# Altium PCB Neural_Interface.PcbDoc
Units mil, origin at the board's own origin, x right, y up, seen from the top; angles counter-clockwise.
Board outline 950 x 670 mil, 4 copper layers (Top Copper Layer, Internal Copper Layer 1, Internal Copper Layer 2, Bottom Copper Layer), stack 62.205 mil thick; 14 components, 31 nets, 97 pads, 11 vias.
Unrouted connection lines stored in the file: 2.
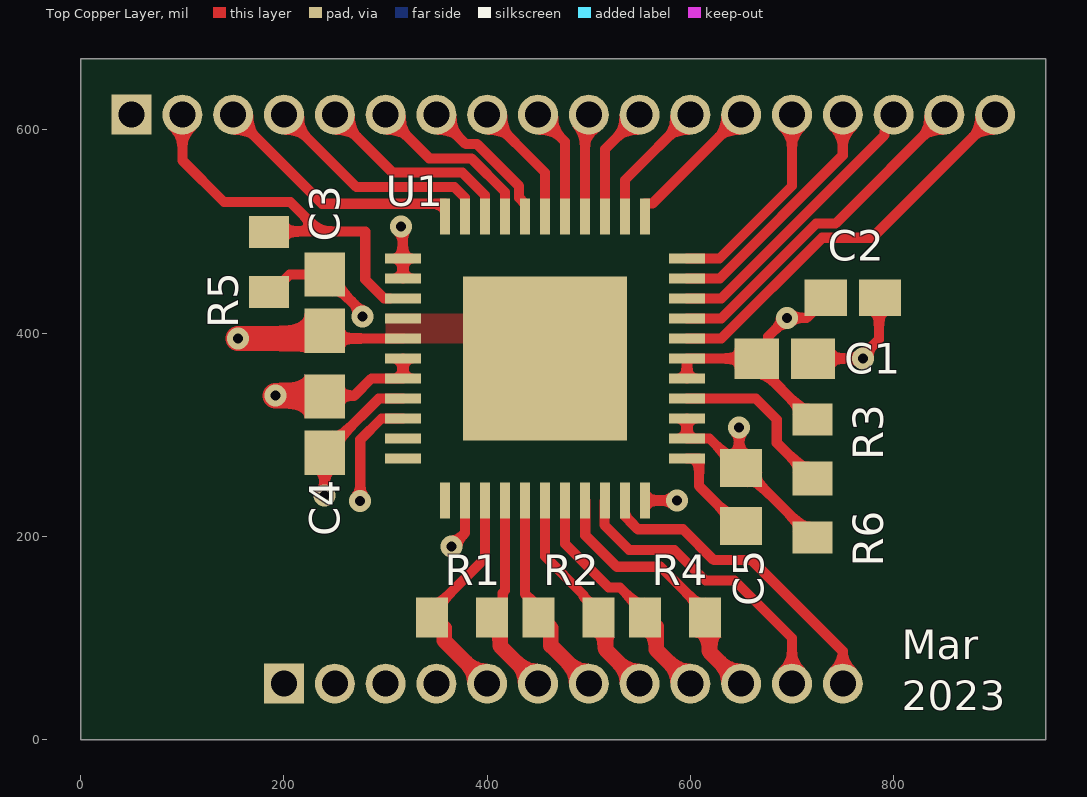
[diagram p0: Top Copper Layer view]
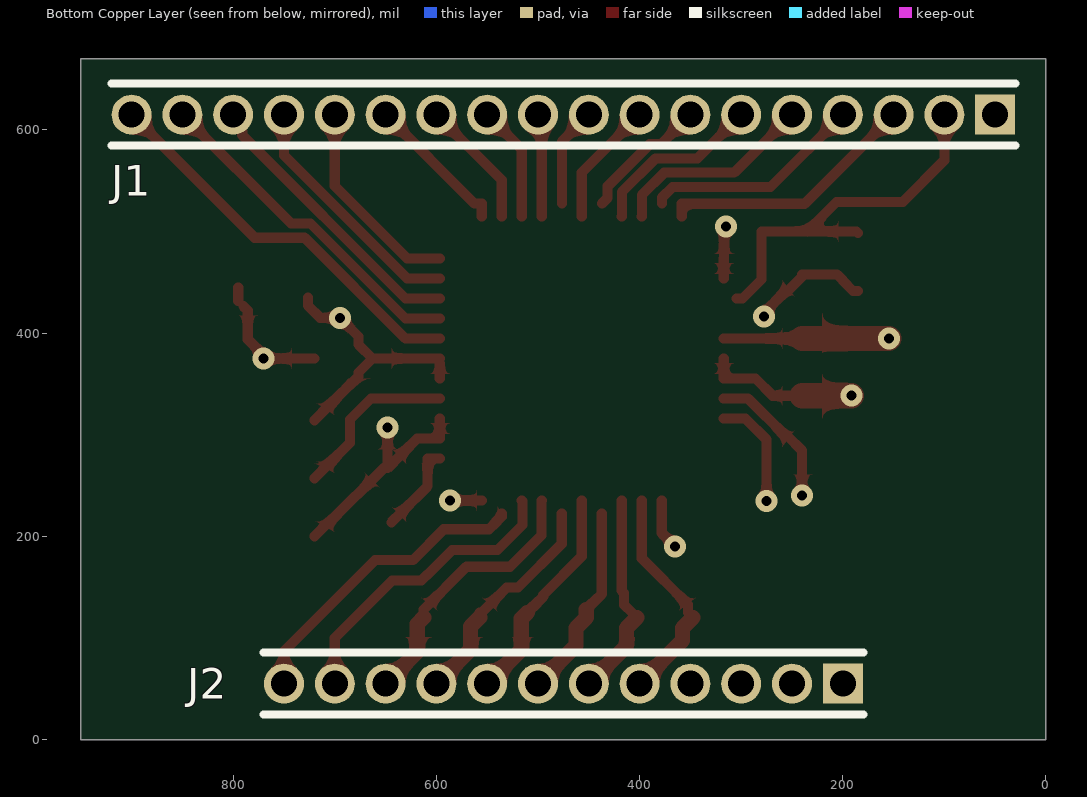
[diagram p1: Bottom Copper Layer view, seen from below]
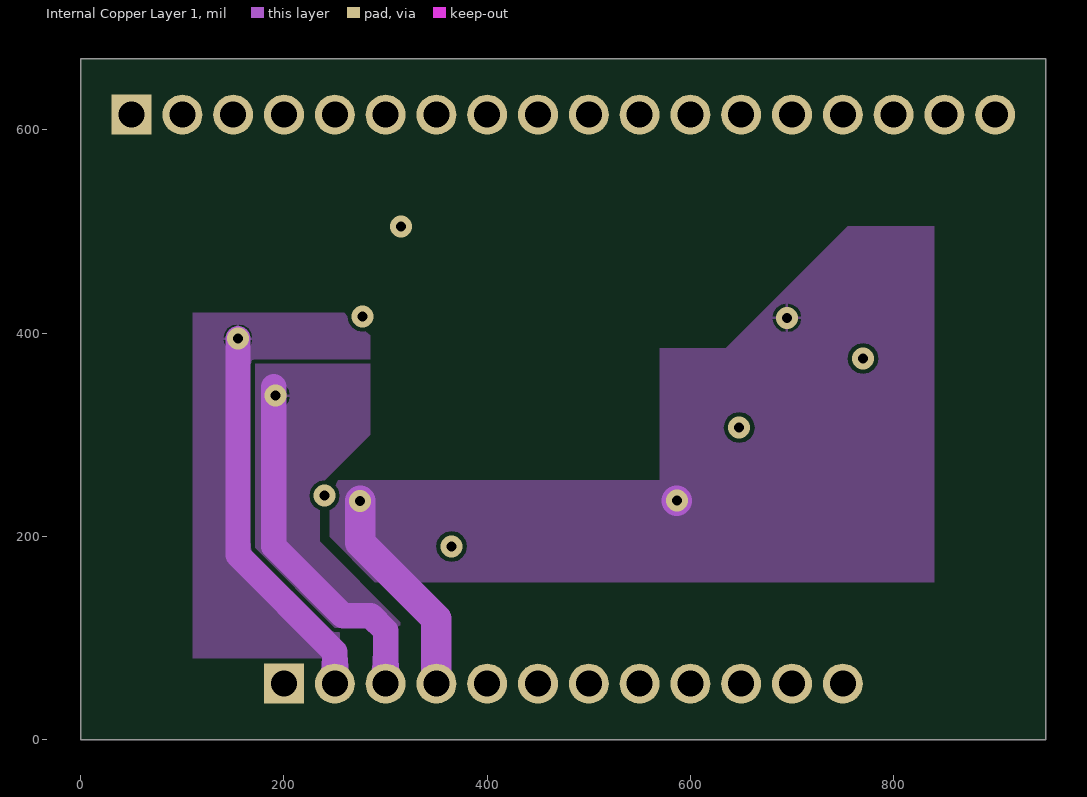
[diagram p2: Internal Copper Layer 1]
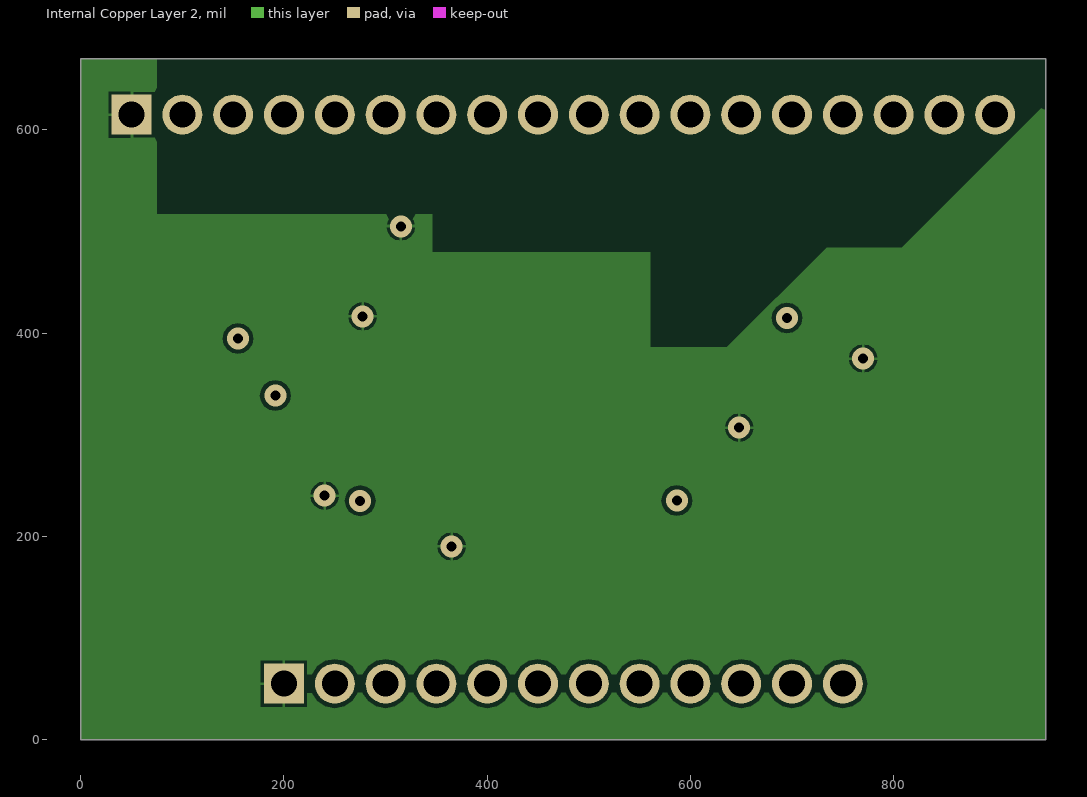
[diagram p3: Internal Copper Layer 2]
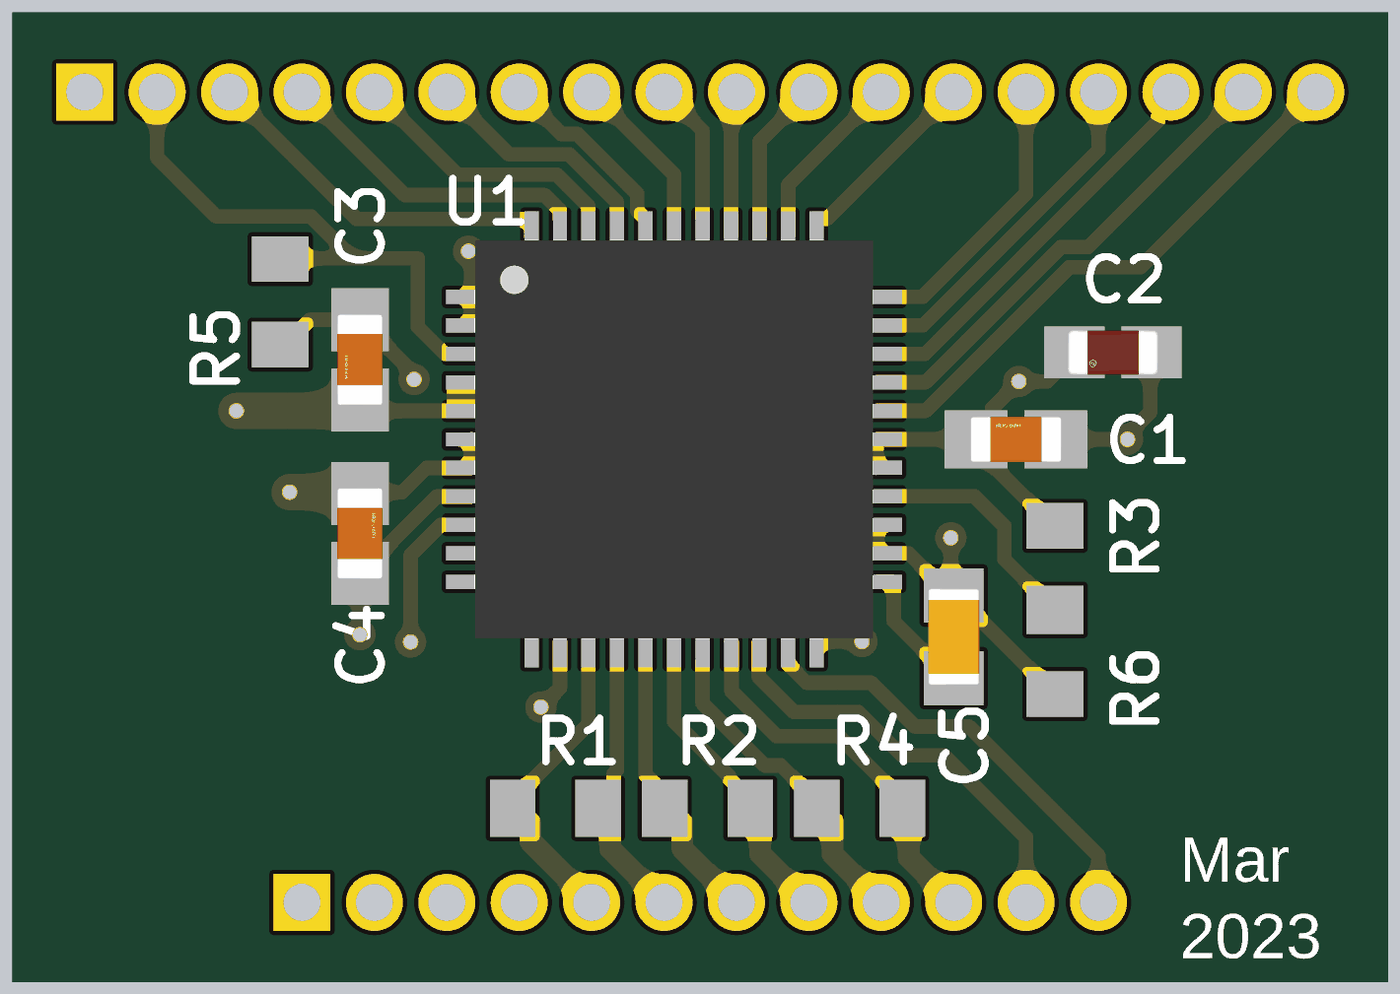
[diagram p4: 3D render of the assembled board from above, using the file's embedded part models]

## Layer stack, top to bottom
Top Solder: solder mask 0.3937, Solder Resist, Dk 3.5
Top Copper Layer: signal copper 1.378
Dielectric 1: prepreg 8.6614, FR-4, Dk 4.2
Internal Copper Layer 1: signal copper 1.378
Dielectric 2: core 39.3701, FR-4, Dk 4.2
Internal Copper Layer 2: signal copper 1.378
Dielectric 3: prepreg 8.6614, FR-4, Dk 4.2
Bottom Copper Layer: signal copper 1.378
Bottom Solder: solder mask 0.3937, Solder Resist, Dk 3.5

## Board outline
0,0 950,0 950,670 0,670

## Design rules (kind name [scope] priority, off if disabled: settings)
BoardOutlineClearance [All] p1: gap=0 ignorepadtopadclearanceinfootprint=FALSE
Clearance [All] p1: gap=4 ignorepadtopadclearanceinfootprint=FALSE
ComponentClearance [All] p1: gap=3.94 collisioncheckmode=3 verticalgap=3.94 showdistances=FALSE
DiffPairsRouting [All] p1: maxlimit=10 minlimit=10 mostfreqgap=10 toplayer_minwidth=15 toplayer_maxwidth=15 toplayer_prefwidth=15 midlayer1_minwidth=15 midlayer1_maxwidth=15 midlayer1_prefwidth=15 midlayer2_minwidth=15 midlayer2_maxwidth=15 midlayer2_prefwidth=15 bottomlayer_minwidth=15 bottomlayer_maxwidth=15 bottomlayer_prefwidth=15 maxuncoupledlength=500
HoleSize [All] p1: absolutevalues=TRUE maxlimit=100 minlimit=3.94 maxpercent=80.000 minpercent=20.000
HoleToHoleClearance [All] p1: gap=10.83 allowstackedmicrovias=TRUE
MinimumAnnularRing [All] p1: minimumring=3.94
MinimumSolderMaskSliver [All] p1: minsoldermaskwidth=2.95
PlaneClearance [All] p1: clearance=2.95
PlaneConnect [All] p1: planeconnectstyle=Relief reliefexpansion=5.91 reliefentries=4 reliefconductorwidth=2.95 reliefairgap=2.95
PolygonConnect [All] p1: connectstyle=Relief reliefconductorwidth=2.95 reliefentries=4 polygonreliefangle="90 Angle" airgapwidth=2.95
RoutingVias [All] p1: holewidth=9.84 width=23.62 viastyle="Through Hole" minholewidth=3.94 minwidth=7.87 maxholewidth=28 maxwidth=50
SilkToSilkClearance [All] p1: silktosilkclearance=5.91
SilkToSolderMaskClearance [IsPad] p1: minsilkscreentomaskgap=5.91 clearancetoexposedcopper=TRUE
SolderMaskExpansion [All] p1: expansion=2.95 istentingtop=FALSE
Width [All] p1: maxlimit=1968.5 minlimit=2.95 preferedwidth=5.91
21 further rules are at their usual default settings.

## Classes and differential pairs
net class ELEC[0..15]: ELEC0 ELEC1 ELEC2 ELEC3 ELEC4 ELEC5 ELEC6 ELEC7 ELEC8 ELEC9 ELEC10 ELEC11 ELEC12 ELEC13 ELEC14 ELEC15
component class U_Intan_RHS2116: C1 C2 C3 C4 C5 U1
component class Neural_Interface: J1 J2 R1 R2 R3 R4 R5 R6
differential pair SCLK1h: +SCLK1h_P -SCLK1h_N
differential pair nCS1h: +nCS1h_P -nCS1h_N
differential pair MOSI1h: +MOSI1h_P -MOSI1h_N
differential pair MISO1h: +MISO1h_P -MISO1h_N

## Components (designator, comment, footprint, x,y, rotation, side; value= is the part's Value field where it differs from the comment)
C1 "UMJ107BB7104KAHT" FP-0603-L_1_6_0_2-W_0_8_0-IPC_B 693,375 r180 top
C2 "LMK107BJ106MALTD" FP-LMK107BJ106MALTD-IPC_B 760,435 r180 top
C3 "UMJ107BB7104KAHT" FP-0603-L_1_6_0_2-W_0_8_0-IPC_B 240,430 r270 top
C4 "UMJ107BB7104KAHT" FP-0603-L_1_6_0_2-W_0_8_0-IPC_B 240,310 r90 top
C5 "GRM188R71H103KA01D" CAPC1608X90X35ML10T15 650,238.54 r270 top
J1 "KH-1.27PH180-1X18P-L7.2" KH-1.27PH180-1X18P-L7.2 475,615 r270 bottom locked
J2 "KH-1.27PH180-1X12P-L7.2" KH-1.27PH180-1X12P-L7.2 475,55 r270 bottom locked
R1 "RC0603FR-07100RL" RESC1608X55X25ML10T15 375,120 r0 top
R2 "RC0603FR-07100RL" RESC1608X55X25ML10T15 585,120 r0 top
R3 "RC0603JR-070RL" RESC1608X55X25ML10T15 720,285.67 r90 top
R4 "RC0603FR-07100RL" RESC1608X55X25ML10T15 480,120 r0 top
R5 "RC0603JR-070RL" RESC1608X55X25ML10T15 185,470 r90 top
R6 "RC0603JR-070RL" RESC1608X55X25ML10T15 720,228.54 r90 top
U1 "Intan Technologies RHS2116 chip" QFN44_7_X_7 456.89,375 r0 top

## Footprints (in the part's own frame and the unit in brackets; to place one, negate y for a bottom-side part, rotate by r counter-clockwise, add the part's x,y. Pads: shape width x height; smd on the part's side, far side on the other; paste and mask are expansions set on the pad)
CAPC1608X90X35ML10T15 [mm] "Chip Capacitor, 2-Leads, Body 1.7x0.9mm, IPC Low Density"
  rect 0.95x1.05 smd: 1(-0.725,0) 2(0.725,0)
  body extent -0.85,-0.45 0.85,0.45, height 0.9
FP-0603-L_1_6_0_2-W_0_8_0-IPC_B [mil]
  rect 43.61x39.85 smd paste+0 mask+0: 1(-27.65,0) 2(27.65,0)
  body extent -59,-30 59,30, height 10
FP-LMK107BJ106MALTD-IPC_B [mil]
  rect 41.64x35.91 smd paste+0 mask+0: 1(-26.66,0) 2(26.66,0)
  body extent -57,-28 57,28, height 10
KH-1.27PH180-1X12P-L7.2 [mm]
  rect 1x1 hole 0.65: 1(0,6.985)
  round 1 hole 0.65: 2(0,5.715) 3(0,4.445) 4(0,3.175) 5(0,1.905) 6(0,0.635) 7(0,-0.635) 8(0,-1.905) 9(0,-3.175) 10(0,-4.445) 11(0,-5.715) 12(0,-6.985)
  silkscreen extent -0.77,-7.5 0.77,7.5
KH-1.27PH180-1X18P-L7.2 [mm]
  rect 1x1 hole 0.65: 1(0,10.795)
  round 1 hole 0.65: 2(0,9.525) 3(0,8.255) 4(0,6.985) 5(0,5.715) 6(0,4.445) 7(0,3.175) 8(0,1.905) 9(0,0.635) 10(0,-0.635) 11(0,-1.905) 12(0,-3.175) 13(0,-4.445) 14(0,-5.715) 15(0,-6.985) 16(0,-8.255) 17(0,-9.525) 18(0,-10.795)
  silkscreen extent -0.77,-11.3 0.77,11.3
QFN44_7_X_7 [mm]
  rect 0.9x0.25 smd: 1(-3.55,2.5) 2(-3.55,2) 3(-3.55,1.5) 4(-3.55,1) 5(-3.55,0.5) 6(-3.55,0) 7(-3.55,-0.5) 8(-3.55,-1) 9(-3.55,-1.5) 10(-3.55,-2) 11(-3.55,-2.5) 23(3.55,-2.5) 24(3.55,-2) 25(3.55,-1.5) 26(3.55,-1) 27(3.55,-0.5) 28(3.55,0) 29(3.55,0.5) 30(3.55,1) 31(3.55,1.5) 32(3.55,2) 33(3.55,2.5)
  rect 0.25x0.9 smd: 12(-2.5,-3.55) 13(-2,-3.55) 14(-1.5,-3.55) 15(-1,-3.55) 16(-0.5,-3.55) 17(0,-3.55) 18(0.5,-3.55) 19(1,-3.55) 20(1.5,-3.55) 21(2,-3.55) 22(2.5,-3.55) 34(2.5,3.55) 35(2,3.55) 36(1.5,3.55) 37(1,3.55) 38(0.5,3.55) 39(0,3.55) 40(-0.5,3.55) 41(-1,3.55) 42(-1.5,3.55) 43(-2,3.55) 44(-2.5,3.55)
  rect 4.1x4.1 smd: CENTER(0,0)
  body extent -3.5,-3.5 3.5,3.5, height 0.77
RESC1608X55X25ML10T15 [mm] "Chip Resistor, 2-Leads, Body 1.60x0.80mm, IPC Low Density"
  rect 0.8x1 smd: 1(-0.75,0) 2(0.75,0)
  body extent -0.85,-0.45 0.85,0.45, height 0.55

## Part data
C1 C3 C4: library part CMP-14477-005276-2, "Multilayer Ceramic Capacitor 0.1uF 50V X7R 10% SMD 0603 T/R", Capacitance=100nF, Case Code (Imperial)=0603, Case Code (Metric)=1608, Max Operating Temperature=125°C, Min Operating Temperature=-55°C, Ratings=AEC-Q200, Tolerance=10%, Voltage Rating=50V, Case/Package=0603, Features="Soft Termination", Length=0.063inch, Mount="Surface Mount", Packaging="Tape and Reel", RoHS Compliant=Yes, Thickness=0.039inch, Width=0.031inch
C2: library part CMP-2000-05443-2, "CAP CER 10UF 10V X5R 0603", Capacitance=10uF, Case Code (Imperial)=0603, Case Code (Metric)=1608, Dielectric=X5R, Max Operating Temperature=85°C, Min Operating Temperature=-55°C, Package Quantity=4000, Resistor Type=Ceramic, Tolerance=20%, Voltage Rating=10V, Case/Package=0603, Construction=Flat, Height=0.8mm, Lead Free="Lead Free", Length=1.6mm, Mount="Surface Mount", Number of Pins=2, Packaging="Tape and Reel", REACH SVHC="No SVHC", RoHS Compliant=Yes, Series=M, Termination=SMD/SMT, Thickness=0.035inch, Voltage Rating (DC)=10V, Width=0.031inch
C5: library part CMP-2100-03642-1, "Chip Capacitor, 10 nF, +/- 10%, 50 V, -55 to 125 degC, 0603 (1608 Metric), RoHS, Tape and Reel", Capacitance=10nF, Case Code (Imperial)=0603, Case Code (Metric)=1608, Dielectric=X7R, Dielectric Material=Ceramic, Insulation Resistance=10GR, Manufacturer=Murata, Max Operating Temperature=125degC, Min Operating Temperature=-55degC, Package Description="2-Pin Surface Mount Device, Body 1.6 x 0.8 mm", Package Quantity=1, Tolerance=10%, Voltage=50V, Case/Package=0603, Datasheet URL=http://search.murata.co.jp/Ceramy/image/img/A01X/G101/ENG/GRM188R71H103KA01-01.pdf, Datasheet Version=42401.0, Depth=0.8mm, Height=0.8mm, Lead Free=LeadFree, Length=1.6mm, Manufacturer URL=http://www.murata.com/, Material=Ceramic, Mount=SurfaceMount, Number of Pins=2, Package Reference=0603, Packaging=TapeandReel, REACH SVHC=Unknown, RoHSCompliant=True, Termination=SMD/SMT, Thickness=0.035inch, Voltage Rating=50V, Voltage Rating (DC)=50V, Width=0.031inch
J1: "1A Straight Square Pins 1mm 3.9mm -40℃~+105℃ 1 18 2.3mm 1.27mm 1x18P Straight, P=1.27mm Pin Headers ROHS", Manufacturer 1="Shenzhen Kinghelm Elec", Manufacturer Part Number 1=KH-1.27PH180-1X18P-L7.2
J2: "1A Straight Square Pins 1mm 3.9mm -40℃~+105℃ 1 2.3mm 12 1.27mm 1x12P Straight, P=1.27mm Pin Headers ROHS", Manufacturer 1="Shenzhen Kinghelm Elec", Manufacturer Part Number 1=KH-1.27PH180-1X12P-L7.2
R1 R2 R4: library part CMP-2100-03663-1, "Chip Resistor, 100 Ohm, +/- 1%, 0.1 W, -55 to 155 degC, 0603 (1608 Metric), RoHS, Tape and Reel", Case Code (Imperial)=0603, Case Code (Metric)=1608, Manufacturer=Yageo, Max Operating Temperature=155degC, Min Operating Temperature=-55degC, Package Description="2-Pin Surface Mount Device, Body 1.6 x 0.8 mm", Power Rating=100mW, Resistance=100Ohm, Temperature Coefficient=100ppm/degreesC, Tolerance=1%, Voltage Rating=50V, Case/Package=0603, Composition=ThickFilm, Datasheet URL=http://www.yageo.com/NewPortal/yageodocoutput?fileName=/pdf/R-Chip/PYu-RC_Group_51_RoHS_L_5.pdf, Datasheet Version="Rev. 5, 10/2016", Depth=0.8mm, Height=0.45mm, Lead Free=LeadFree, Length=1.6mm, Manufacturer URL=http://www.yageo.com/, Military Standard=Not, Number of Pins=2, Package Reference=0603, Packaging=TapeandReel, REACH SVHC=Unknown, RoHSCompliant=true, Termination=SMD/SMT, Voltage Rating (DC)=50V, Width=0.8mm
R3 R5 R6: library part CMP-2100-03667-1, "Chip Resistor, 0 Ohm, +/- 5%, 0.1 W, -55 to 155 degC, 0603 (1608 Metric), RoHS, Tape and Reel", Case Code (Imperial)=0603, Case Code (Metric)=1608, Manufacturer=Yageo, Max Operating Temperature=155degC, Min Operating Temperature=-55degC, Package Description="2-Pin Surface Mount Device, Body 1.6 x 0.8 mm", Package Quantity=5000, Power Rating=100mW, Resistance=0mOhm, Temperature Coefficient=200ppm/degreesC, Tolerance=5%, Voltage Rating=50V, Case/Package=0603, Composition=ThickFilm, Contact Plating=Tin, Datasheet URL=http://www.yageo.com/NewPortal/yageodocoutput?fileName=/pdf/R-Chip/PYu-RC_Group_51_RoHS_L_5.pdf, Datasheet Version="Rev. 5, 10/2016", Depth=0.8mm, Height=0.45mm, Lead Free=LeadFree, Length=1.6mm, Manufacturer URL=http://www.yageo.com/, Military Standard=Not, Number of Pins=2, Package Reference=0603, Packaging=TapeandReel, Radiation Hardening=No, REACH SVHC=NoSVHC, RoHSCompliant=true, Termination=SMD/SMT, Voltage Rating (DC)=50V, Width=0.8mm
U1: library part RHS2116_QFN, Manufacturer="Intan Technologies", Manufacturer Part Number=RHS2116, ComponentLink1Discription=Datasheet, ComponentLink1URL=http://intantech.com/files/Intan_RHS2116_datasheet.pdf, ComponentLink2Discription="Bare Die", ComponentLink2URL=http://intantech.com/files/RHS2116_die_diagram.pdf, Pricing 1="1-24=325;  25-99=278;  100-249=233;  250-499=188;  500-999=151  (USD)", Supplier 1=Intan, Supplier Link 1=http://intantech.com/products_RHS2000.html, Supplier Part Number 1=RHS2116

## Via types
v1: diameter 21.65, hole 9.84, Top Copper Layer to Bottom Copper Layer, tented both sides, 11 vias

## Nets (pads, with @x,y where several pads share a name; then routed paths per layer and width w, separated by ;. In a path a pad name is that pad's centre, name@x,y a point inside that pad or via, vN(x,y) a via of type N, cw(c..) or ccw(c..) an arc to the next point about the centre after c; other vN are vias at no path point)
ELEC0: J1.3 U1.44 | length 257.3
  Top Copper Layer w10: J1.3 237.61,527.39 358.38,527.39 358.46,527.32 U1.44
ELEC1: J1.4 U1.43 | length 217.7
  Top Copper Layer w10: J1.4 271.24,543.76 367.51,543.76 378.07,533.21 U1.43@378.07,527.48
ELEC2: J1.5 U1.42 | length 201.8
  Top Copper Layer w10: J1.5 307,558 375.77,558 397.75,536.02 397.75,514.84 U1.42
ELEC3: J1.6 U1.41 | length 173.1
  Top Copper Layer w10: J1.6 343,572 384.26,572 417.44,538.83 417.44,514.84 U1.41
ELEC4: J1.7 U1.40 | length 130.1
  Top Copper Layer w10: J1.7 379,586 390.06,586 431.44,544.62 431.44,533.16 U1.40@437.12,527.48
ELEC5: J1.8 U1.39 | length 123.8
  Top Copper Layer w10: J1.8 456.89,558.11 U1.39
ELEC6: J1.9 U1.38 | length 98.5
  Top Copper Layer w10: J1.9 476.5,588.5 U1.38@476.5,527.48
ELEC7: J1.10 U1.37 | length 101.8
  Top Copper Layer w10: U1.37 496.26,611.26 J1.10
ELEC8: J1.11 U1.36 | length 114.3
  Top Copper Layer w10: U1.36 516.03,514.84 516.03,581.03 J1.11
ELEC9: J1.12 U1.35 | length 126.9
  Top Copper Layer w10: U1.35 535.71,514.84 535.71,550.71 J1.12
ELEC10: J1.13 U1.34 | length 143.6
  Top Copper Layer w10: U1.34 555.32,527.4 555.4,527.48 562.48,527.48 J1.13
ELEC11: J1.14 U1.33 | length 203.1
  Top Copper Layer w10: U1.33 628.63,473.43 700,544.8 J1.14
ELEC12: J1.15 U1.32 | length 233.6
  Top Copper Layer w10: U1.32 596.73,453.82 628.82,453.82 750,575 J1.15@750,605
ELEC13: J1.16 U1.31 | length 284.9
  Top Copper Layer w10: U1.31 596.73,434.14 630.36,434.14 791.08,594.87 791.08,598.14 800,607.05 J1.16
ELEC14: J1.17 U1.30 | length 336.5
  Top Copper Layer w10: U1.30 596.73,414.45 630.47,414.45 723.92,507.9 742.9,507.9 J1.17
ELEC15: J1.18 U1.29 | length 394.6
  Top Copper Layer w10: U1.29 630.51,394.69 729.72,493.9 778.9,493.9 J1.18
GND: C1.1 C2.1 C3.1 C4.1 C5.1 J1.1 J2.1 R5.1 R6.1 U1.1 U1.2 U1.8 U1.13 U1.24 U1.25 | length 713.3
  Top Copper Layer w10: R5.1@185,441.46 189.92,441.46 199.69,451.22 199.69,451.79 205.54,457.65 C3.1 240,455.77 254.92,440.84 256.8,440.84 275.17,422.48 275.17,418.65 v1(277.4,416.42) ; v1(240,240) C4.1@240,284.23 ; v1(315,505) 316.89,503.11 316.89,473.51 316.97,473.43 U1.1 U1.2 ; U1.8 317.05,335.55 293.2,335.55 256.8,299.16 254.92,299.16 C4.1@240,284.23 ; v1(365,190) 378.15,203.15 U1.13 ; U1.25 U1.24 618.86,296.26 634.33,280.79 648.03,267.09 v1(648.03,306.97) ; C5.1 651.97,267.09 705.35,213.7 706.3,213.7 R6.1@720,200 ; C1.1@720,375 C1.1 v1(770,375) 770,378.15 785.67,393.82 785.67,422.2 C2.1@790,426.54 ; C2.1@795,431.54 C2.1@795,445 ; C4.1@240,284.23 C4.1 C4.1@240,284.23
LVDS_EN: R3.1 R6.2 U1.26 | length 169.3
  Top Copper Layer w10: U1.26 664.37,335.63 685,315 685,292.13 R6.2@706.3,270.83 ; R6.2@706.3,270.79 R6.2@719.96,257.13
MISO1h_N: J2.11 U1.20 | length 300.1
  Top Copper Layer w10: U1.20 515.31,234.6 515.31,211.15 539.88,186.57 584.33,186.57 609.02,161.89 609.47,161.89 614.78,156.57 643.43,156.57 700,100 J2.11
MISO1h_P: J2.12 U1.21 | length 304.2
  Top Copper Layer w10: U1.21@535.63,222.52 535.63,219.57 548.3,206.89 592.75,206.89 623.07,176.57 660.43,176.57 750,87 J2.12
MOSI1h_N: J2.9 R2.1 U1.18 | length 221.3
  Top Copper Layer w10: U1.18@476.58,222.52 476.58,192.75 519.66,149.67 530.72,149.67 555.39,125 R2.1@557.44,125
  Top Copper Layer w15: R2.1@557.44,120 566.32,111.12 566.32,88.68 J2.9
MOSI1h_P: J2.10 R2.2 U1.19 | length 264.2
  Top Copper Layer w10: U1.19 496.58,235.24 496.58,201.04 527.62,170 570.51,170 612.56,127.95 R2.2@612.56,125
  Top Copper Layer w15: R2.2@612.56,120 618.88,113.68 618.88,86.12 J2.10
nCS1h_N: J2.5 R1.1 U1.14 | length 215.8
  Top Copper Layer w10: R1.1@352.44,125 352.44,132.95 397.83,178.34 U1.14
  Top Copper Layer w15: R1.1@347.44,120 357.66,109.78 357.66,97.34 J2.5
nCS1h_P: J2.6 R1.2 U1.15 | length 199
  Top Copper Layer w10: R1.2@407.56,125 415.28,132.72 415.28,144.28 417.52,146.53 U1.15
  Top Copper Layer w15: R1.2@402.56,120 412.78,109.78 412.78,92.22 J2.6
NetC5_2: C5.2 U1.23 | length 89.6
  Top Copper Layer w10: U1.23 608.55,276.57 608.63,276.49 608.63,249.4 634.33,223.7 C5.2@644.34,213.69
SCLK1h_N: J2.7 R4.1 U1.16 | length 191.5
  Top Copper Layer w10: U1.16@437.2,222.52 437.2,143.19 R4.1@452.44,127.95
  Top Copper Layer w15: R4.1@452.44,120 462.66,109.78 462.66,92.34 J2.7 ; R4.1@452.44,122.05 R4.1@452.44,127.95
SCLK1h_P: J2.8 R4.2 U1.17 | length 218.8
  Top Copper Layer w10: U1.17 456.89,180.26 494.84,142.31 494.84,140.67 R4.2@510.51,125
  Top Copper Layer w15: R4.2@510.51,125 516.38,119.13 516.38,88.62 J2.8
VDD: C1.2 C2.2 J2.4 R3.2 U1.9 U1.22 U1.27 U1.28 | length 616.6
  Top Copper Layer w10: v1(275,235) 275,295 295.94,315.94 U1.9 ; U1.22 v1(586.65,235.24) ; U1.27 596.65,370 ; U1.28 C1.2@662.91,375 ; R3.2@720,314.21 706.3,327.91 676.61,357.6 676.61,361.3 C1.2@662.91,375 ; C2.2@726.54,435 726.54,427.13 714.41,415 v1(695,415) 676.61,396.61 676.61,388.7 C1.2@662.91,375
  Internal Copper Layer 1 w30: v1(275,235) 275,193.73 350,118.73 J2.4 ; v1@586.41,235 v1(586.65,235.24)
VREF: J1.2 R5.2 U1.3 | length 384.1
  Top Copper Layer w10: J1.2 100,570 141,529 206.2,529 235.2,500 ; R5.2@185,498.54 186.46,500 235.2,500 ; U1.3@304.41,434.14 298.67,434.14 279.99,452.82 279.99,500 235.2,500
VSTIMN: C3.2 J2.2 U1.4 U1.5 U1.CENTER | length 541.6
  Top Copper Layer w10: C3.2@240,394.69 U1.5
  Top Copper Layer w25: v1(154.69,394.69) C3.2@240,394.69
  Internal Copper Layer 1 w25: v1(154.69,394.69) 154.69,181.6 250,86.29 J2.2
VSTIMP: C4.2 J2.3 U1.6 U1.7 | length 506.3
  Top Copper Layer w10: C4.2 240.73,338.38 269.07,338.38 286,355.31 U1.7 U1.6
  Top Copper Layer w25: v1(191.46,338.54) C4.2@240,338.54
  Internal Copper Layer 1 w25: v1@190,347.09 190,190 258.13,121.87 285.36,121.87 300,107.23 J2.3
pads on no net: U1.10 U1.11 U1.12

## Polygon pours and split planes (outlines as drawn)
VDD on Internal Copper Layer 1 "VDD_L02_P015" (solid, pour order 15): 289.37,155 840,155 840,505 755,505 635,385 570,385 570,255 245,255 245,199.37
VSTIMN on Internal Copper Layer 1 "VSTIMN_L02_P014" (solid, pour order 14): 110,80 110,420 285,420 285,370 160,370 160,200 255,105 255,80
VSTIMP on Internal Copper Layer 1 "VSTIMP_L02_P013" (solid, pour order 13): 315,115 235,195 235,250 285,300 285,370 170,370 170,190 250,110 309.66,110 316.46,103.19
GND on Internal Copper Layer 2 "GND_L03_P016" (solid, pour order 16): 950,0 950,670 0,670 0,0
VSTIMN on Top Copper Layer "Top Copper Layer-VSTIMN" (solid, pour order 12): 462,419 462,390 300,390 300,419

## Other copper
Internal Copper Layer 2:
  pour cut-out: 75,517 346,517 346,479.64 560.34,479.64 560.34,386 636,386 734,484 808,484 950,626 950,670 75,670

## Silkscreen, mask and mechanical layers (free items; w line width, h text height)
Top Overlay:
  text "Mar / 2023" at 808,19 h50